# EAGLE board PCB2D-amplificatore-audio (EAGLE 9.7.0)
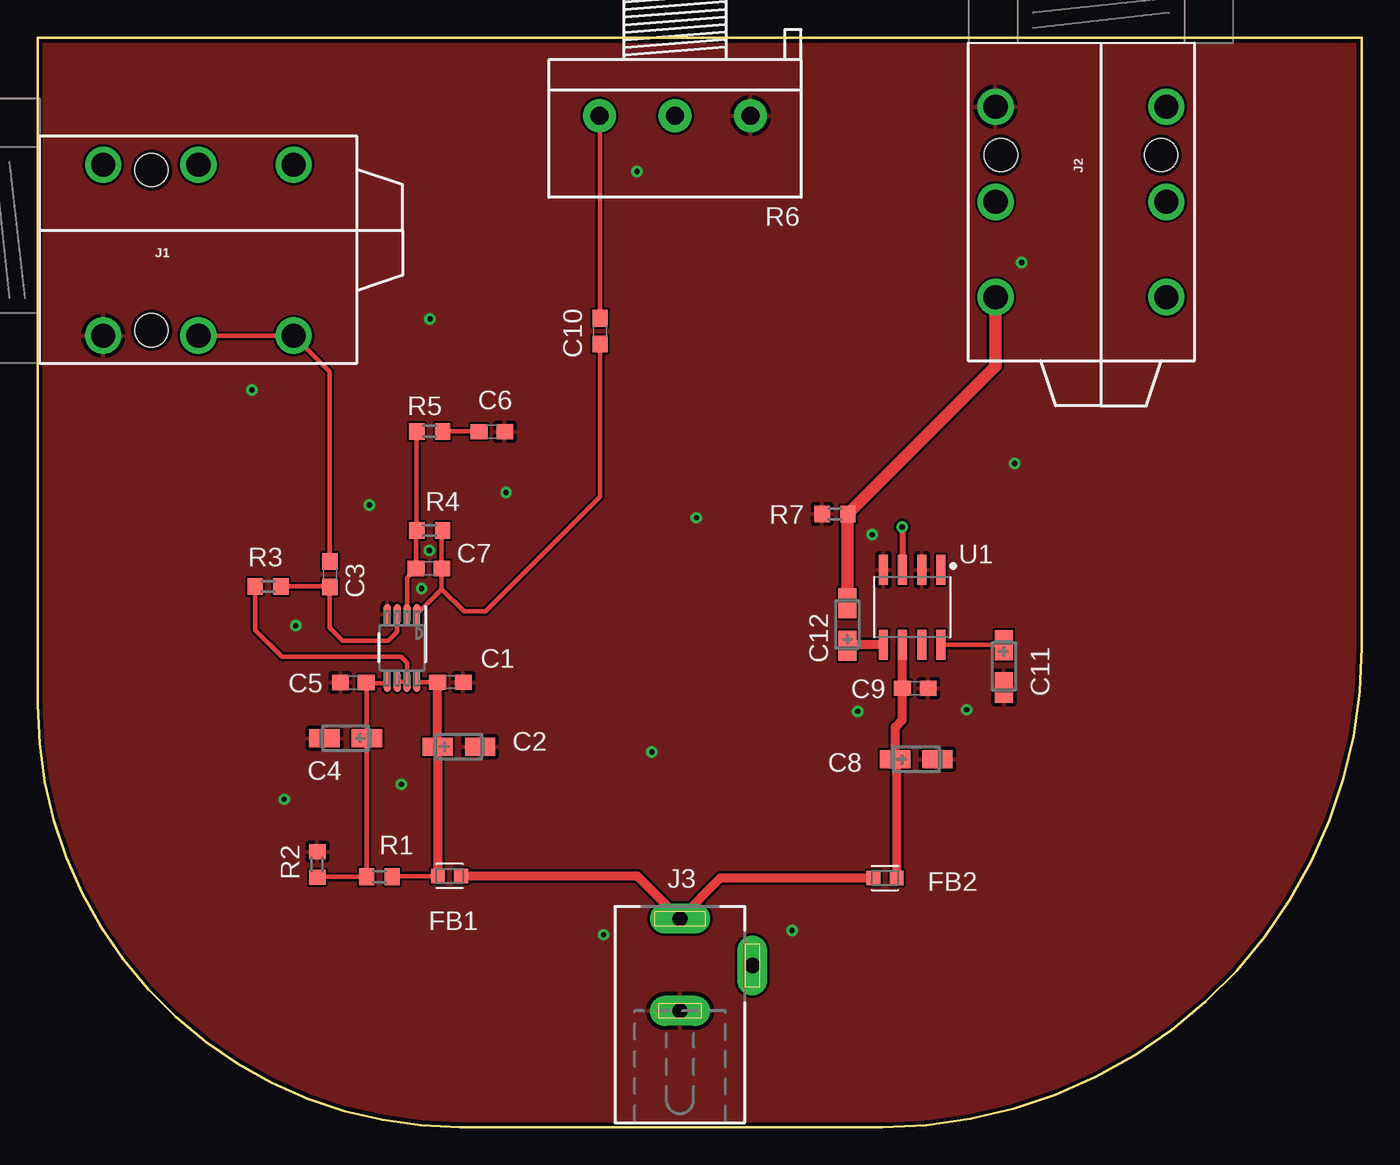
[diagram p0: board, top side]
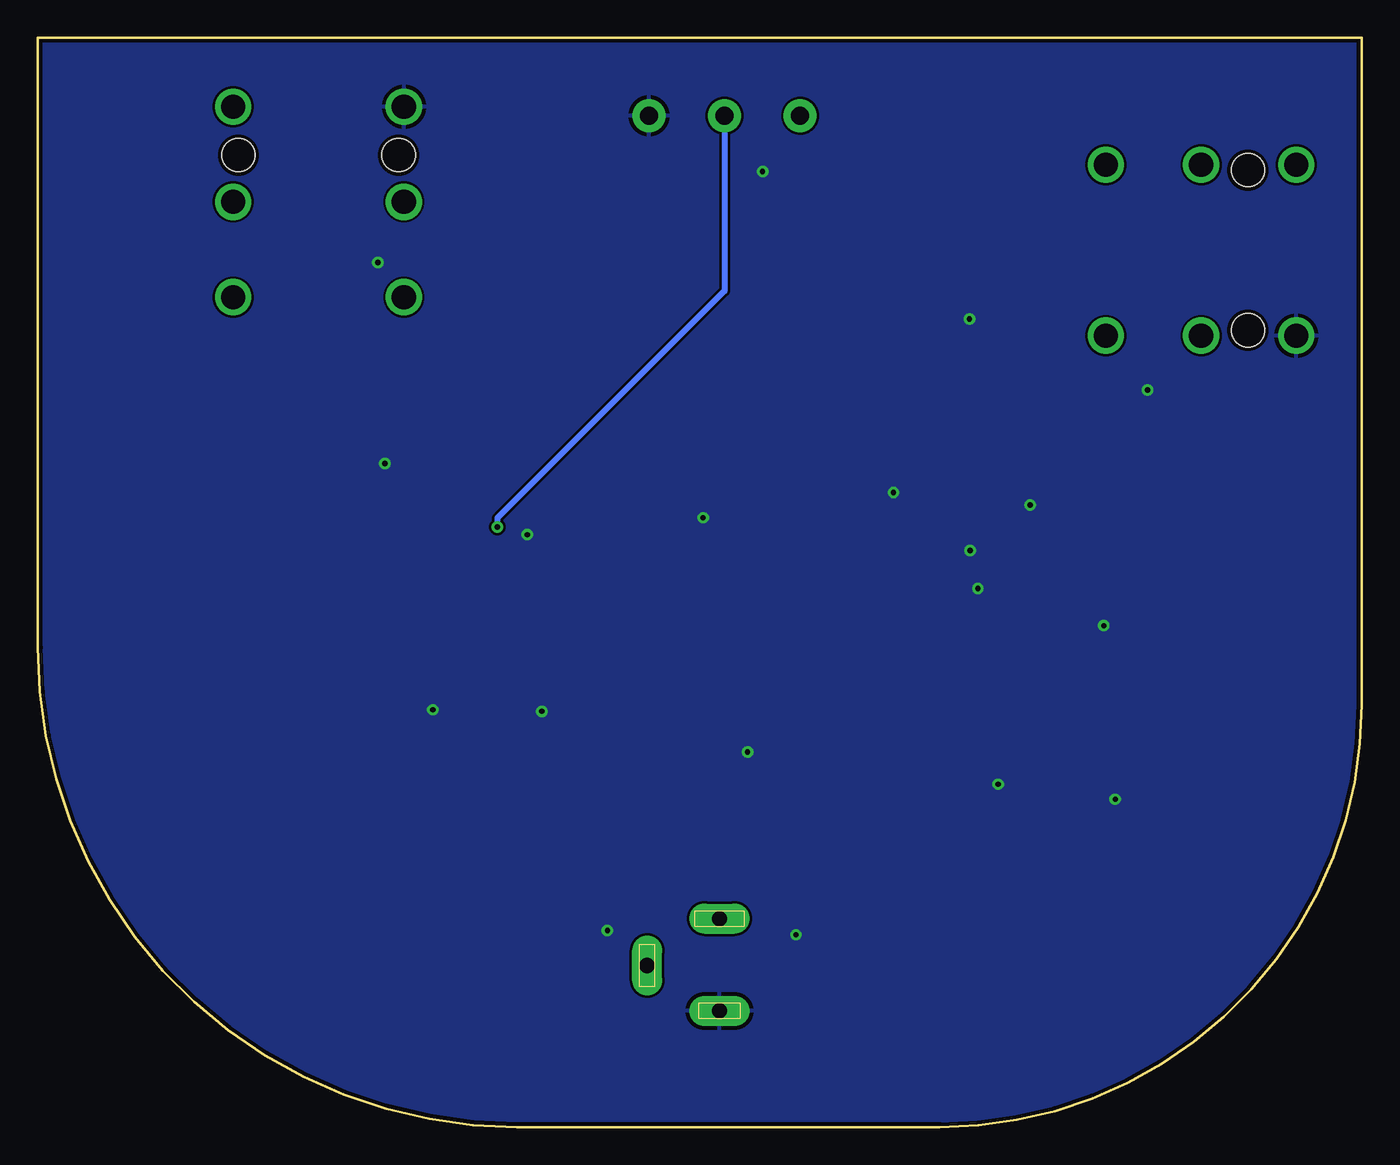
[diagram p1: board, bottom side, seen from below]

Size 87.61 x 72.06 mm. Coordinates in mm from the lower left corner, seen from the top.
Outline: 55.88,0 arc90 87.61,31.73 87.61,72.06 0,72.06 0,27.94 arc90 27.94,0 55.88,0
Copper layers (1*16): Top 0.035mm / dielectric 1.5mm / Bottom 0.035mm
Design rules "Fusion Electronics Design Rules": minimum track width 12mil, minimum drill 0.35mm, track to track 6mil, track to pad 6mil, pad to pad 6mil, via to via 6mil, smd to smd 6mil, copper to edge 10mil, drill to drill 6mil, minimum pad ring 10mil, minimum via ring 8mil, stop-mask expansion 4mil, vias tented up to drill 9999mil, thermal gap 10mil

## Footprints (pad centres in the part's own frame; a part is rotated, then mirrored left to right if it is on the bottom)
C0603 = smd 1.1 x 1: 1 -0.85,0; 2 0.85,0
CT3216 = smd 2 x 1.2: + -1.4,0; - 1.4,0
BEADC1608X95N = smd 0.9 x 0.97: 1 -0.785,0 | smd 0.933 x 0.97: 2 0.769,0
AUDIO_JACK_0.25"_TRS_PTH_RA = drill 1.6: RING 10.5,-6.95; RING-NORM 10.5,4.35; SLEEVE 4.2,-6.95; SLEEVE-NORM 4.2,4.35; TIP 16.8,-6.95; TIP-NORM 16.8,4.35 | hole 2.2: 7.4,4; 7.4,-6.6
DCJ0202 = drill 1 pad 2 long: 1 0,3.1; 2 4.8,0; 3 0,-3
R0603 = smd 1 x 1.1: 1 -0.85,0; 2 0.85,0
3RP/1610N = drill 1.2 pad 2.184: 1 -5,0; 2 0,0; 3 5,0
SOIC127P600X175-8N = smd 1.969 x 0.592: 1 -2.474,1.905; 2 -2.474,0.635; 3 -2.474,-0.635; 4 -2.474,-1.905; 5 2.474,-1.905; 6 2.474,-0.635; 7 2.474,0.635; 8 2.474,1.905
DGK0008A_N = smd 1.35 x 0.45: 1 -2.225,0.975; 2 -2.225,0.325; 3 -2.225,-0.325; 4 -2.225,-0.975; 5 2.225,-0.975; 6 2.225,-0.325; 7 2.225,0.325; 8 2.225,0.975

## Placement (x,y rotation side)
C1  100n  [C0603]  27.3,29.44 0 top
C2  10u  [CT3216]  27.86,25.17 0 top
C3  1u  [C0603]  19.33,36.58 270 top
C4  22u  [CT3216]  20.37,25.73 180 top
C5  100n  [C0603]  20.88,29.41 180 top
C6  1u  [C0603]  30.05,46 180 top
C7  47p  [C0603]  25.88,36.96 0 top
C8  100u  [CT3216]  58.14,24.33 0 top
C9  100n  [C0603]  58.06,29.03 0 top
C10  1u  [C0603]  37.21,52.65 90 top
C11  22u  [CT3216]  63.93,30.48 270 top
C12  1000u  [CT3216]  53.57,33.25 90 top
FB1  BLM18AG601SN1D 600R@100MHz  [BEADC1608X95N]  27.25,16.61 0 top
FB2  BLM18AG601SN1D 600R@100MHz  [BEADC1608X95N]  56.06,16.48 180 top
J1  AUDIO_JACK_TRS_0.25"_PTH_RA  [AUDIO_JACK_0.25"_TRS_PTH_RA]  0.13,59.31 0 top
J2  AUDIO_JACK_TRS_0.25"_PTH_RA  [AUDIO_JACK_0.25"_TRS_PTH_RA]  70.33,71.7 270 top
J3  DCJ0202  [DCJ0202]  42.49,10.69 0 top
R1  47k  [R0603]  22.61,16.56 0 top
R2  47k  [R0603]  18.49,17.37 270 top
R3  10k  [R0603]  15.24,35.76 0 top
R4  10k  [R0603]  25.93,39.47 180 top
R5  10k  [R0603]  25.93,46.02 0 top
R6  10K  [3RP/1610N]  42.16,66.9 180 top
R7  10  [R0603]  52.76,40.56 180 top
U1  LM386_SOIC  [SOIC127P600X175-8N]  57.86,34.39 270 top
U2  OPA1678IDGKR  [DGK0008A_N]  24.1,31.7 270 top

## Library data of the parts
C1-C12 = rcl; SPICEPREFIX: C
FB1 FB2 = Filter; CATEGORY_L1: Ferrite Bead; CATEGORY_L2: Ferrite Chip Beads; CATEGORY_L3: NA; CURRENT_RATING: 500mA; DATASHEET: https://www.murata.com/products/productdata/8796738650142/ENFA0003.pdf; DC_RESISTANCE: 380mOhm; DESCRIPTION: 600 Ohms @ 100 MHz 1 Ferrite Bead 0603 (1608 Metric) 500mA 380mOhm; IMPEDANCE: 600Ohms; MANUFACTURER: Murata Electronics; MPN: BLM18AG601SN1D; OPERATING_TEMPERATURE: -55°C ~ 125°C; PACKAGE: Surface Mount; PACKAGE_SIZE: 0603; PART_STATUS: Active; ROHS: Compliant; SERIES: MIFIL® BLM18
J1 J2 = SparkFun-Connectors; PROD_ID: CONN-12339; SF_ID: COM-11144
J3 = con-jack; OC_FARNELL: unknown; OC_NEWARK: unknown
R1-R5 R7 = rcl; SPICEPREFIX: R
R6 = pot
U1 = IC_Linear; CATEGORY_L1: Linear ICs; CATEGORY_L2: Amplifiers; CATEGORY_L3: Audio; DESCRIPTION: Amplifier IC 1-Channel (Mono) Class AB 8-SOIC; PACKAGE: Surface Mount; PACKAGE_SIZE: 8-SOIC; SERIES: LM386
U2 = OPA1678.lbr; COPYRIGHT: Copyright (C) 2026 Ultra Librarian. All rights reserved.; DATASHEET: https://www.ti.com/lit/gpn/opa1678; DESCRIPTION: Low distortion (-120 dB), low noise (4.5nV/rtHz), dual audio op amp 8-VSSOP -40 to 85; MANUFACTURER_NAME: Texas Instruments; MANUFACTURER_PART_NUMBER: OPA1678IDGKR; REFDES: RefDes; TYPE: TYPE

## Nets
+E: C1.1 C2.+ FB1.1 R1.2 U2.8
+K: C8.+ C9.1 FB2.1 U1.6
AGND: C1.2 C2.- C4.- C5.2 C6.1 C8.- C9.2 C11.- J1.SLEEVE J2.SLEEVE J3.3 R2.1 R6.1 R7.2 U1.2 U1.4 U2.4
IN: C3.1 J1.RING J1.TIP
N$1: C11.+ U1.8
N$2: C4.+ C5.1 R1.1 R2.2 U2.5
N$3: R6.2 U1.3
N$4: C3.2 R3.2 U2.3
N$5: C12.- J2.TIP R7.1
N$6: C7.1 R4.2 R5.1 U2.2
N$7: C6.2 R5.2
N$8: C10.2 R6.3
OUT-LM386: C12.+ U1.5
OUT-OPA1678: C7.2 C10.1 R4.1 U2.1
V_REF: R3.1 U2.6 U2.7
VDD: FB1.2 FB2.2 J3.1

## Tracks (layer width: path | path; a pad name or v marks a point on that pad's centre or on a via)
+E
  Top 0.305: C1.1 25.12,29.44 U2.8 | FB1.1 23.51,16.61 R1.2
  Top 0.61: C1.1 26.46,29.43 C2.+ FB1.1
+K
  Top 0.305: 57.21,31.91 U1.6
  Top 0.61: 57.21,31.91 C9.1 57.21,26.94 56.74,26.46 C8.+ 56.84,24.23 FB2.1
AGND  (via drill 0.35 pad 0.61)
  other vias: 40.64,24.82 24.05,22.68 16.31,21.69 17.07,33.17 21.95,41.15 30.99,41.99 25.96,53.47 61.47,27.61 14.17,48.77 64.64,43.89 37.44,12.73 43.59,40.31 49.91,13 55.22,39.19 65.1,57.2 39.65,63.22 25.91,38.15 25.4,35.64 54.25,27.51
  pour Top: 27.94,0.08 55.88,0.08 58.49,0.18 61.09,0.51 63.65,1.04 66.16,1.79 68.6,2.74 70.95,3.89 73.19,5.23 75.32,6.75 77.32,8.44 79.17,10.29 80.86,12.29 82.38,14.42 83.72,16.66 84.87,19.01 85.82,21.45 86.57,23.96 87.1,26.52 87.43,29.12 87.53,31.73 87.53,71.98 0.08,71.98 0.08,27.94 0.17,25.64 0.46,23.35 0.93,21.1 1.59,18.89 2.42,16.75 3.43,14.68 4.61,12.7 5.95,10.83 7.44,9.07 9.07,7.44 10.83,5.95 12.7,4.61 14.68,3.43 16.75,2.42 18.89,1.59 21.1,0.93 23.35,0.46 25.64,0.17
  pour Bottom: 27.94,0.08 55.88,0.08 58.49,0.18 61.09,0.51 63.65,1.04 66.16,1.79 68.6,2.74 70.95,3.89 73.19,5.23 75.32,6.75 77.32,8.44 79.17,10.29 80.86,12.29 82.38,14.42 83.72,16.66 84.87,19.01 85.82,21.45 86.57,23.96 87.1,26.52 87.43,29.12 87.53,31.73 87.53,71.98 0.08,71.98 0.08,27.94 0.17,25.64 0.46,23.35 0.93,21.1 1.59,18.89 2.42,16.75 3.43,14.68 4.61,12.7 5.95,10.83 7.44,9.07 9.07,7.44 10.83,5.95 12.7,4.61 14.68,3.43 16.75,2.42 18.89,1.59 21.1,0.93 23.35,0.46 25.64,0.17
IN
  Top 0.305: C3.1 19.33,49.96 17.07,52.22 J1.TIP J1.RING
N$1
  Top 0.305: U1.8 63.89,31.92 C11.+
N$2
  Top 0.305: R2.2 18.53,16.56 R1.1 21.76,25.71 C4.+ 21.77,29.37 | 21.77,29.37 C5.1 | U2.5 23.03,29.37 21.77,29.37
N$3  (via drill 0.35 pad 0.61)
  Top 0.406: v57.2,39.7 57.2,36.89 U1.3
  Bottom 0.406: R6.2 42.16,55.32 57.2,40.28 v57.2,39.7
N$4
  Top 0.305: R3.2 19.29,35.76 C3.2 19.33,33.02 20.17,32.18 23.19,32.18 23.78,32.77 U2.3
N$5
  Top 0.813: C12.- 53.57,40.53 R7.1 63.38,50.34 J2.TIP
N$6
  Top 0.305: U2.2 24.43,36.35 C7.1 25.03,39.42 R4.2 R5.1
N$7
  Top 0.305: R5.2 29.17,46.02 C6.2
N$8
  Top 0.305: C10.2 37.21,66.86 R6.3
OUT-LM386
  Top 0.61: U1.5 53.64,31.92 C12.+
OUT-OPA1678
  Top 0.305: U2.1 26.73,35.58 | 26.73,35.58 C7.2 26.73,39.42 R4.1 | C10.1 37.21,41.71 29.62,34.11 28.2,34.11 26.73,35.58
V_REF
  Top 0.305: U2.6 U2.7 24.43,30.71 24.03,31.12 16.15,31.12 14.39,32.88 R3.1
VDD
  Top 0.61: FB1.2 39.68,16.61 J3.1 45.19,16.48 FB2.2